# Altium PCB eeu.PcbDoc
Units mm, origin at the board's own origin, x right, y up, seen from the top; angles counter-clockwise.
Board outline 35.27 x 34.43 mm, 2 copper layers (Top Layer, Bottom Layer), stack 1.58 mm thick; 19 components, 60 nets, 41 pads, 8 vias.
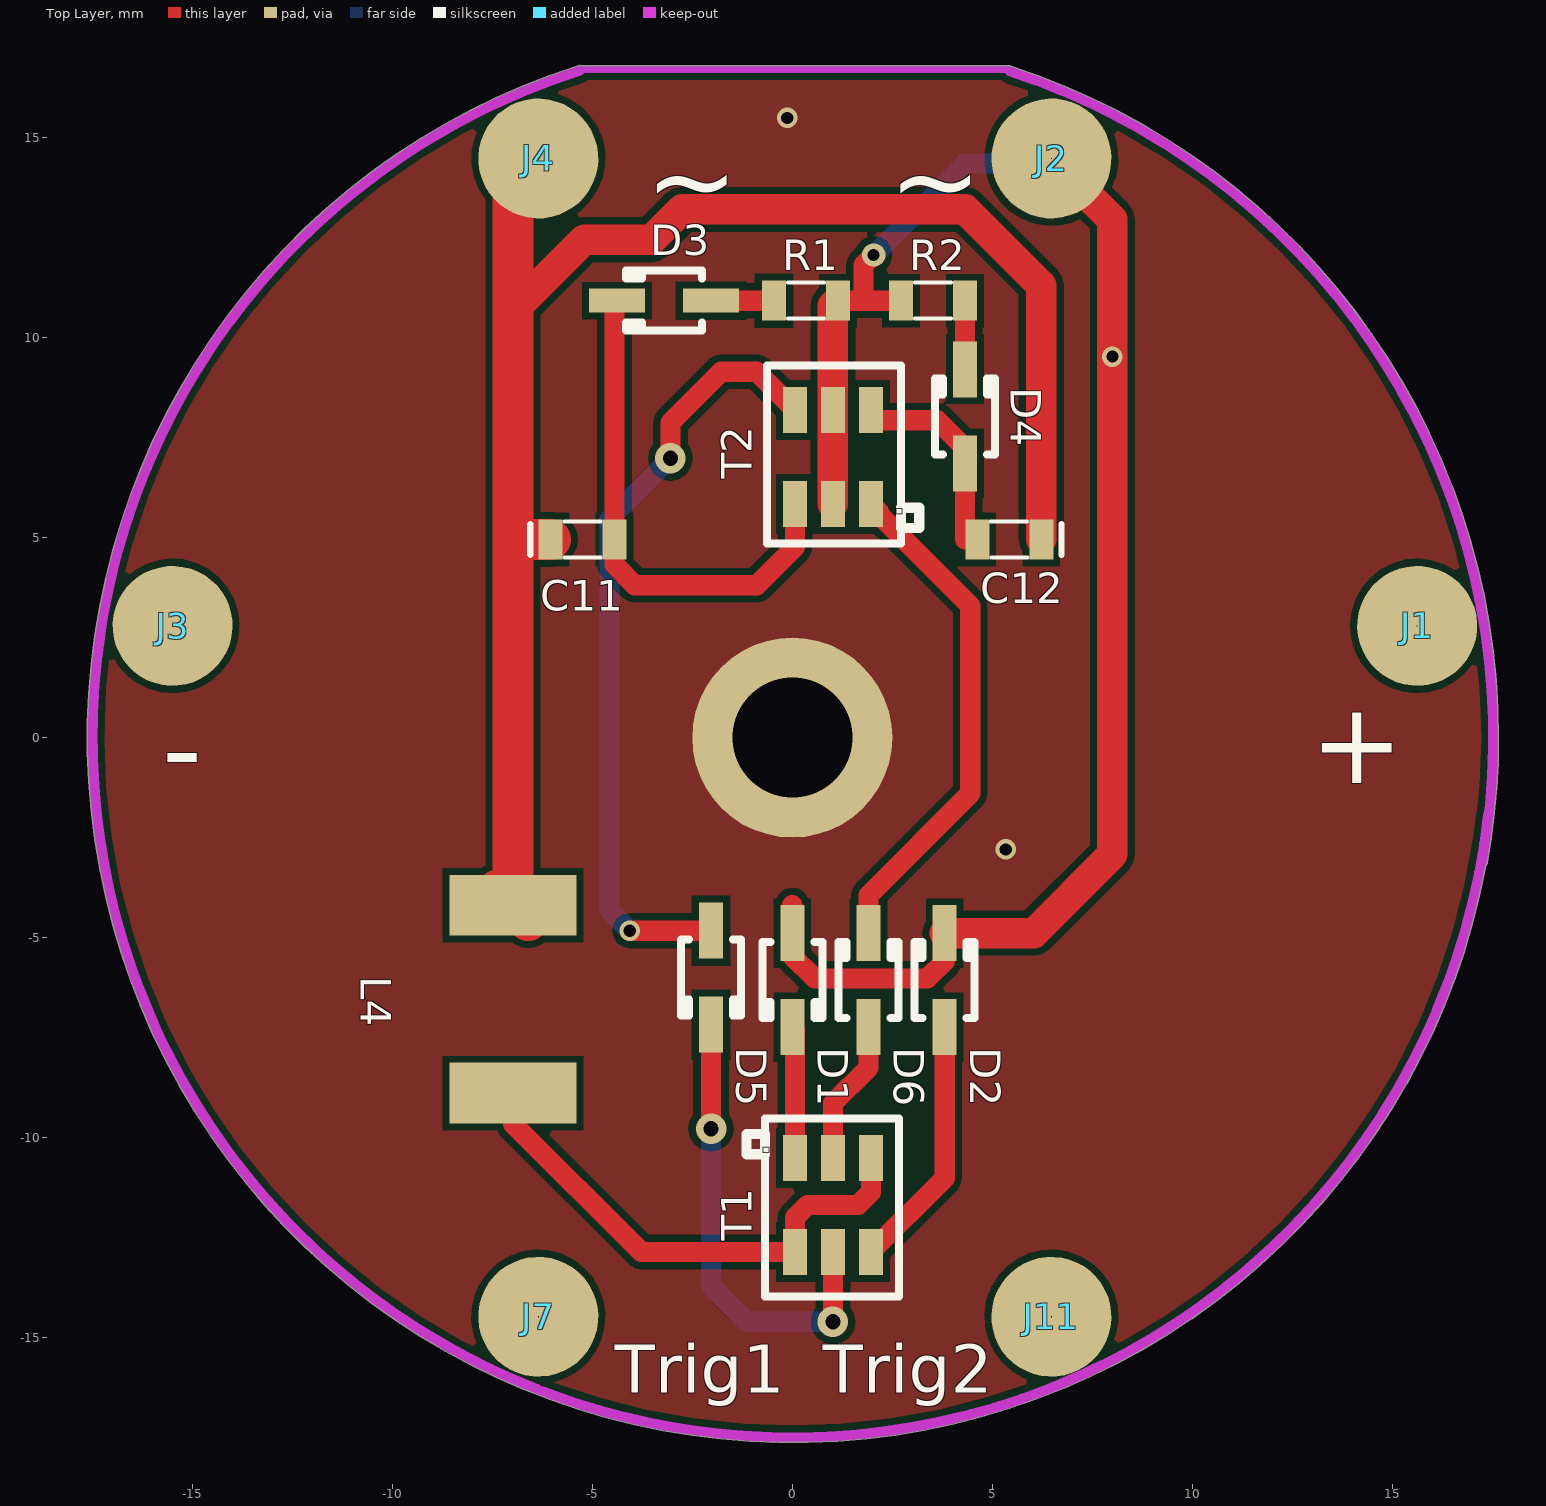
[diagram p0: Top Layer view]
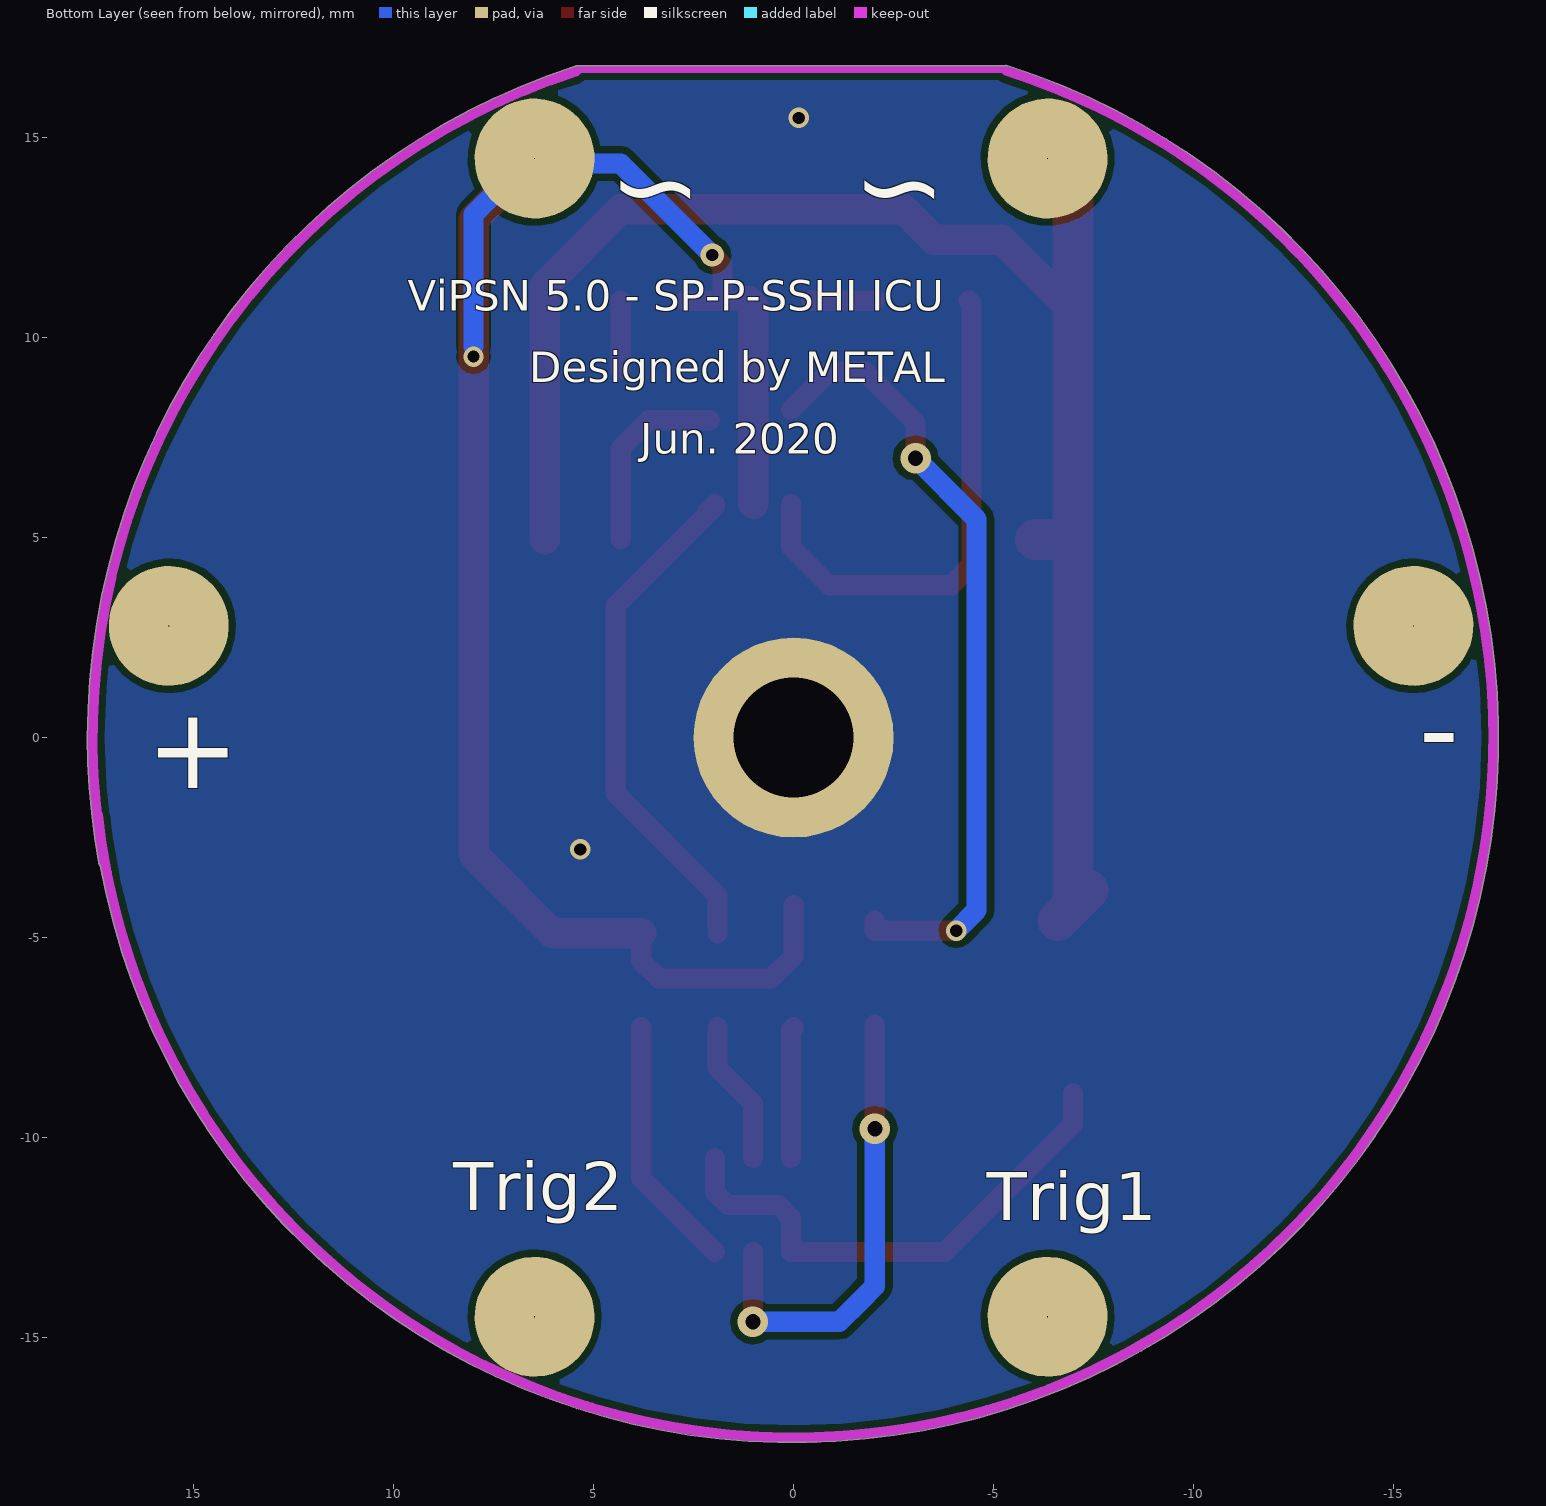
[diagram p1: Bottom Layer view, seen from below]
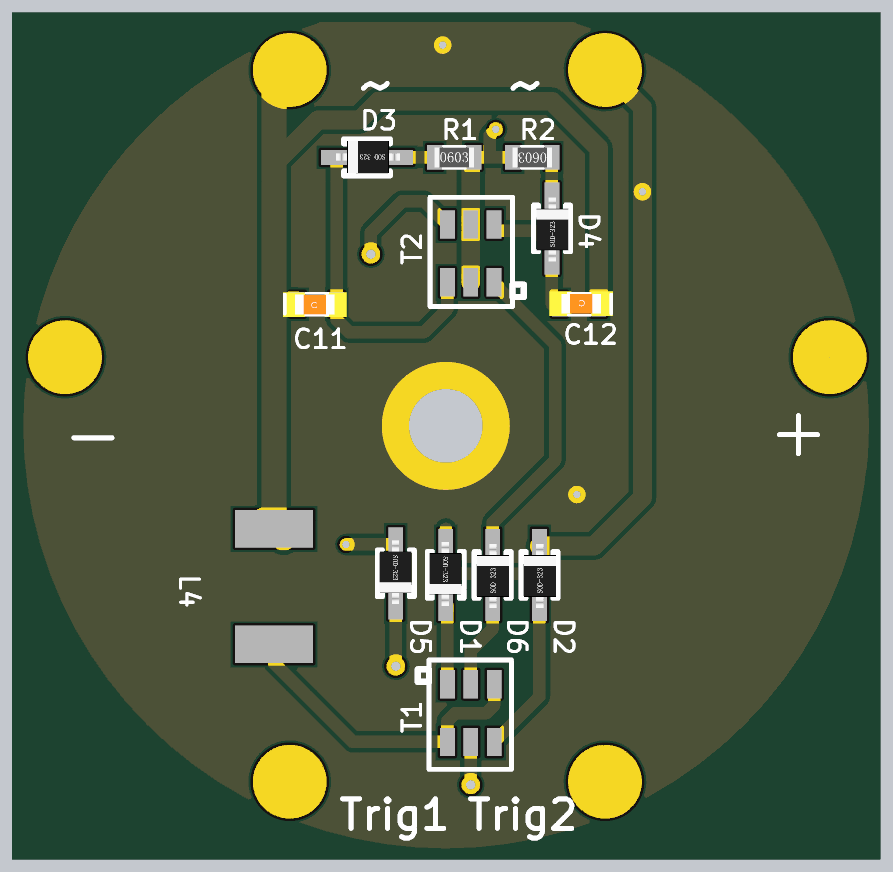
[diagram p2: 3D render of the assembled board from above, using the file's embedded part models]

## Layer stack, top to bottom
Top Layer: signal copper 0.0356
Dielectric: dielectric 1.509, FR-4, Dk 4.8
Bottom Layer: signal copper 0.0356

## Board outline
5.39,16.797 cw(c5.39,16.708) 5.42,16.792 cw(c5.426,16.665) 5.465,16.786 cw(c0,0) 17.653,0 cw(c0,0) 17.374,-3.127 cw(c17.249,-3.104) 17.337,-3.196 cw(c0.002,0.002) -5.351,16.797 cw(c-5.312,16.676) -5.274,16.797

## Design rules (kind name [scope] priority, off if disabled: settings)
Clearance [All] p1: gap=0.178
ComponentClearance [All] p1: gap=0 collisioncheckmode=3 verticalgap=0 showdistances=FALSE
PlaneConnect [All] p1: planeconnectstyle=Direct reliefexpansion=0.508 reliefentries=4 reliefconductorwidth=0.254 reliefairgap=0.254
PolygonConnect [All] p1: connectstyle=Direct reliefconductorwidth=0.254 reliefentries=4 polygonreliefangle="90 Angle"
RoutingVias [All] p1: holewidth=0.711 width=1.27 viastyle="Through Hole" minholewidth=0.711 minwidth=1.27 maxholewidth=0.711 maxwidth=1.27
SilkscreenOverComponentPads [IsPad] p1: minsilkscreentomaskgap=0.254
SolderMaskExpansion [All] p1: expansion=0.102
Width [All] p1: maxlimit=2.54 minlimit=0.178 preferedwidth=1.27
25 further rules are at their usual default settings.

## Components (designator, comment, footprint, x,y, rotation, side; value= is the part's Value field where it differs from the comment)
C11 "680pF/50V" 0603C -6.045,4.953 r0 top
C12 "680pF/50V" 0603C 6.223,4.953 r180 top
D1 "SS14" SOD323 0,-4.889 r270 top
D2 "SS14" SOD323 3.81,-7.239 r90 top
D3 "SS14" SOD323 -2.032,10.922 r180 top
D4 "SS14" SOD323 4.318,6.858 r90 top
D5 "SS14" SOD323 -2.032,-4.826 r270 top
D6 "SS16" SOD323 1.905,-7.239 r90 top
J1 "Socket" PIN1 15.621,2.794 r100 top
J2 "Socket" PIN1 6.477,14.478 r130 top
J3 "Socket" PIN1 -15.494,2.794 r260 top
J4 "Socket" PIN1 -6.35,14.478 r230 top
J7 "Socket" PIN1 -6.35,-14.478 r340 top
J11 "Socket" PIN1 6.477,-14.478 r20 top
L4 "1mH" 1812 -6.985,-4.191 r270 top
R1 "510K" 0603 0.343,10.922 r0 top
R2 "510K" 0603 3.518,10.922 r180 top
T1 "XN4601" XN4601 1.016,-11.684 r90 top
T2 "XN4601" XN4601 1.015,7.017 r270 top

## Footprints (in the part's own frame and the unit in brackets; to place one, negate y for a bottom-side part, rotate by r counter-clockwise, add the part's x,y. Pads: shape width x height; smd on the part's side, far side on the other; paste and mask are expansions set on the pad)
0603 [mm]
  rect 0.6x1 smd: 1(-0.8,0) 2(0.8,0)
  silkscreen extent -0.45,-0.45 0.45,0.45, body extent -0.8,-0.4 0.8,0.4, height 0.45
0603C [mm]
  rect 0.6x1 smd: 1(0,0) 2(1.6,0)
  silkscreen extent -0.51,-0.45 1.25,0.45, body extent -0.59,-0.52 2.01,0.48, height 0.89
1812 [mil]
  rect 60x125 smd: 1(0,0) 2(185,0)
PIN1 [mm] "Connector; Plug"
  round 3 hole 0.015: 1(0,0)
SOD323 [mm] "0805"
  rect 1.4x0.6 smd: 1(0,0) 2(2.35,0)
  silkscreen extent 0.22,-0.75 2.12,0.75, body extent -0.17,-0.67 2.43,0.63, height 1
XN4601 [mm] "Composite N-type & P-type Transistors"
  rect 1.15x0.6 smd: 1(1.175,0.95) 2(1.175,0) 3(1.175,-0.95) 4(-1.175,-0.95) 5(-1.175,0) 6(-1.175,0.95)
  silkscreen extent -2.29,-1.65 2.16,2.16, body extent -0.87,-1.55 0.88,1.55, height 1.3

## Part data
C11 C12: library part CAP, "贴片电容"
D1 D2 D3 D4 D5 D6: library part "Diode 1N4004", "1 Amp General Purpose Rectifier"
L4: library part INDUCTOR
R1 R2: library part Res1, "贴片电阻"
T1: "Composite Transistors"

## Free pads (board coordinates)
  round 5 hole 3: 0(0,0)

## Via types
v1: diameter 0.508, hole 0.305, Top Layer to Bottom Layer, 4 vias
v2: diameter 0.762, hole 0.381, Top Layer to Bottom Layer, 3 vias
v3: diameter 0.584, hole 0.305, Top Layer to Bottom Layer, 1 vias

## Nets (pads, with @x,y where several pads share a name; then routed paths per layer and width w, separated by ;. In a path a pad name is that pad's centre, name@x,y a point inside that pad or via, vN(x,y) a via of type N, cw(c..) or ccw(c..) an arc to the next point about the centre after c; other vN are vias at no path point)
ANT: 
DEC2: 
DEC3: 
EXTI: J11.1
GND: pad.0
  other v1: 5.334,-2.794 -0.127,15.494
NetC2_2: 
NetC6_1: 
NetC11_2: C11.2 D3.2 T2.3 | length 12.8
  Top Layer w0.508: D3.2 -4.445,10.859 C11.2 -4.445,4.318 -3.937,3.81 -0.889,3.81 0.065,4.764 T2.3
NetC12_2: C12.2 D4.1 T2.6 | length 4.8
  Top Layer w0.508: T2.6@2.092,7.934 3.623,7.934 4.318,7.239 D4.1 4.318,4.953
NetD1_2: D1.2 T1.1 | length 3.3
  Top Layer w0.508: D1.2 0.066,-7.305 T1.1
NetD2_1: D2.1 T1.4 | length 6.4
  Top Layer w0.508: T1.4 3.81,-11.015 D2.1
NetD3_1: D3.1 R1.1 | length 1.6
  Top Layer w0.508: D3.1 R1.1
NetD4_2: D4.2 R2.1 | length 1.7
  Top Layer w0.508: D4.2 R2.1
NetD5_1: D5.1 T2.4 | length 19.9
  Top Layer w0.508: v1(-4.064,-4.826) D5.1 D5.1@-2.032,-4.572 ; v2(-3.048,6.985) -3.048,7.874 -1.778,9.144 -0.887,9.144 T2.4
  Bottom Layer w0.508: v1(-4.064,-4.826) -4.572,-4.318 -4.572,5.461 v2(-3.048,6.985)
NetD5_2: D5.2 T1.5 | length 11.7
  Top Layer w0.508: v2(-2.032,-9.779) D5.2 ; v2(1.016,-14.605) T1.5
  Bottom Layer w0.508: v2(-2.032,-9.779) -2.032,-13.716 -1.651,-14.097 -1.143,-14.605 v2(1.016,-14.605)
NetD6_1: D6.1 T1.2 | length 3.6
  Top Layer w0.508: T1.2 1.016,-9.144 1.905,-8.255 D6.1
NetD6_2: D6.2 T2.1 | length 13.1
  Top Layer w0.508: D6.2 1.905,-3.937 4.445,-1.397 4.445,3.302 1.965,5.782 T2.1 T2.1@2.159,5.648
NetL1_1: 
NetL1_2: 
NetL4_2: L4.2 T1.3 T1.6 | length 13
  Top Layer w0.508: L4.2 -6.985,-9.652 -3.778,-12.859 T1.6 0.066,-11.999 0.381,-11.684 1.651,-11.684 1.966,-11.369 T1.3
P0.02: 
P0.03: 
P0.04: 
P0.05: 
P0.06: 
P0.07: 
P0.08: 
P0.09/NFC1: 
P0.10/NFC2: 
P0.12: J7.1
P0.13: 
P0.14: 
P0.15: 
P0.16: 
P0.17: 
P0.18: 
P0.19: 
P0.20: 
P0.22: 
P0.23: 
P0.24: 
P0.25: 
P0.26: 
P0.27: 
P0.28: 
P0.29: 
P0.30: 
P0.31: 
PIE1_1: D1.1 D2.2 J2.1 R1.2 R2.2 T2.2 T2.5 | length 48.8
  Top Layer w0.381: D1.1@0,-5.334 D1.1 ; D2.2@3.81,-5.334 D2.2
  Top Layer w0.508: D1.1@0,-4.191 D1.1 0,-5.461 0.56,-6.021 3.377,-6.021 3.81,-5.588 D2.2 ; R1.2@1.142,10.921 R1.2 1.778,10.922 ; v3(2.032,12.065) 1.778,11.811 1.778,10.922 ; R2.2 1.778,10.922
  Top Layer w0.762: T2.2 T2.5 1.015,10.794 R1.2 ; D2.2 6.033,-4.889 8.001,-2.921 8.001,12.954 J2.1
  Bottom Layer w0.508: v3(2.032,12.065) 4.318,14.351 6.477,14.351 6.731,14.351 8.001,13.081 8.001,9.779
  other v1: 8.001,9.525
PIE2_2: C11.1 C12.1 L4.1 | length 41.5
  Top Layer w0.762: -6.985,10.668 -5.207,12.446 -3.519,12.446 -2.757,13.208 4.318,13.208 6.223,11.303 C12.1
  Top Layer w1.016: L4.1@-7.366,-3.81 L4.1 ; -6.985,13.843 -6.985,10.668 -6.985,4.953 ; L4.1@-6.604,-4.572 L4.1 ; C11.1 -6.985,4.953 ; L4.1 -6.985,4.953
RF: 
SWDCLK: 
SWDIO: 
VIN+: J4.1 | length 0.1
  Top Layer w0.254: J4.1 J4.1@-6.283,14.478
VIN-: 
VOUT: J3.1
XC1: 
XC2: 
XL1: 
XL2: 
pads on no net: J1.1

## Polygon pours and split planes (outlines as drawn)
GND on Bottom Layer "Top Layer-No Net" (solid, remove dead copper, pour order 1000): -21.336,20.701 -19.812,19.177 25.654,19.177 25.654,-20.574 23.241,-22.987 22.225,-21.971 -25.781,-21.971 -25.781,10.414 -15.24,20.955
GND on Top Layer "Top Layer-No Net" (solid, remove dead copper, pour order 1001): -22.987,23.056 -19.177,19.114 25.019,19.114 25.019,-19.123 16.129,-28.321 6.985,-18.86 -23.495,-18.86 -23.495,20.165 -15.367,28.575

## Keep-outs
Keep-Out Layer:
  lines w0.178: -5.323,16.708 5.39,16.708
  lines w0.254: -6.429,16.278 ccw(c0.002,0.002) 17.395,-1.933 cw(c0.002,0.002) -5.312,16.676 ; 5.426,16.665 cw(c0,0) 17.249,-3.104 ccw(c0,0) 17.483,-1.231

## Silkscreen, mask and mechanical layers (free items; w line width, h text height)
Top Overlay:
  text "~" at -3.683,12.954 h2.03
  text "~" at 2.413,12.954 h2.03
  text "+" at 12.954,-1.143 h2.03
  text "-" at -15.748,-1.27 h2.03
  text "Trig1" at -4.445,-16.383 h1.2
  text "Trig2" at 0.762,-16.383 h1.2
Bottom Overlay:
  text "~" at -3.81,12.827 h2.03
  text "~" at 2.286,12.827 h2.03
  text "ViPSN 5.0 - SP-P-SSHI ICU" at 9.652,10.668 h0.76
  text "Designed by METAL" at 6.604,8.89 h0.76
  text "Jun. 2020" at 3.84,7.094 h0.76
  text "-" at -16.637,-0.762 h2.03
  text "+" at 13.843,-1.27 h2.03
  text "Trig2" at 8.509,-11.811 h1.2
  text "Trig1" at -4.826,-12.065 h1.2